# Altium PCB 89C51.PcbDoc
Units mil, origin at the board's own origin, x right, y up, seen from the top; angles counter-clockwise.
Board outline 2952.76 x 2952.76 mil, 2 copper layers (Top Layer, Bottom Layer); 22 components, 41 nets, 122 pads, 976 vias.
Unrouted connection lines stored in the file: 16.
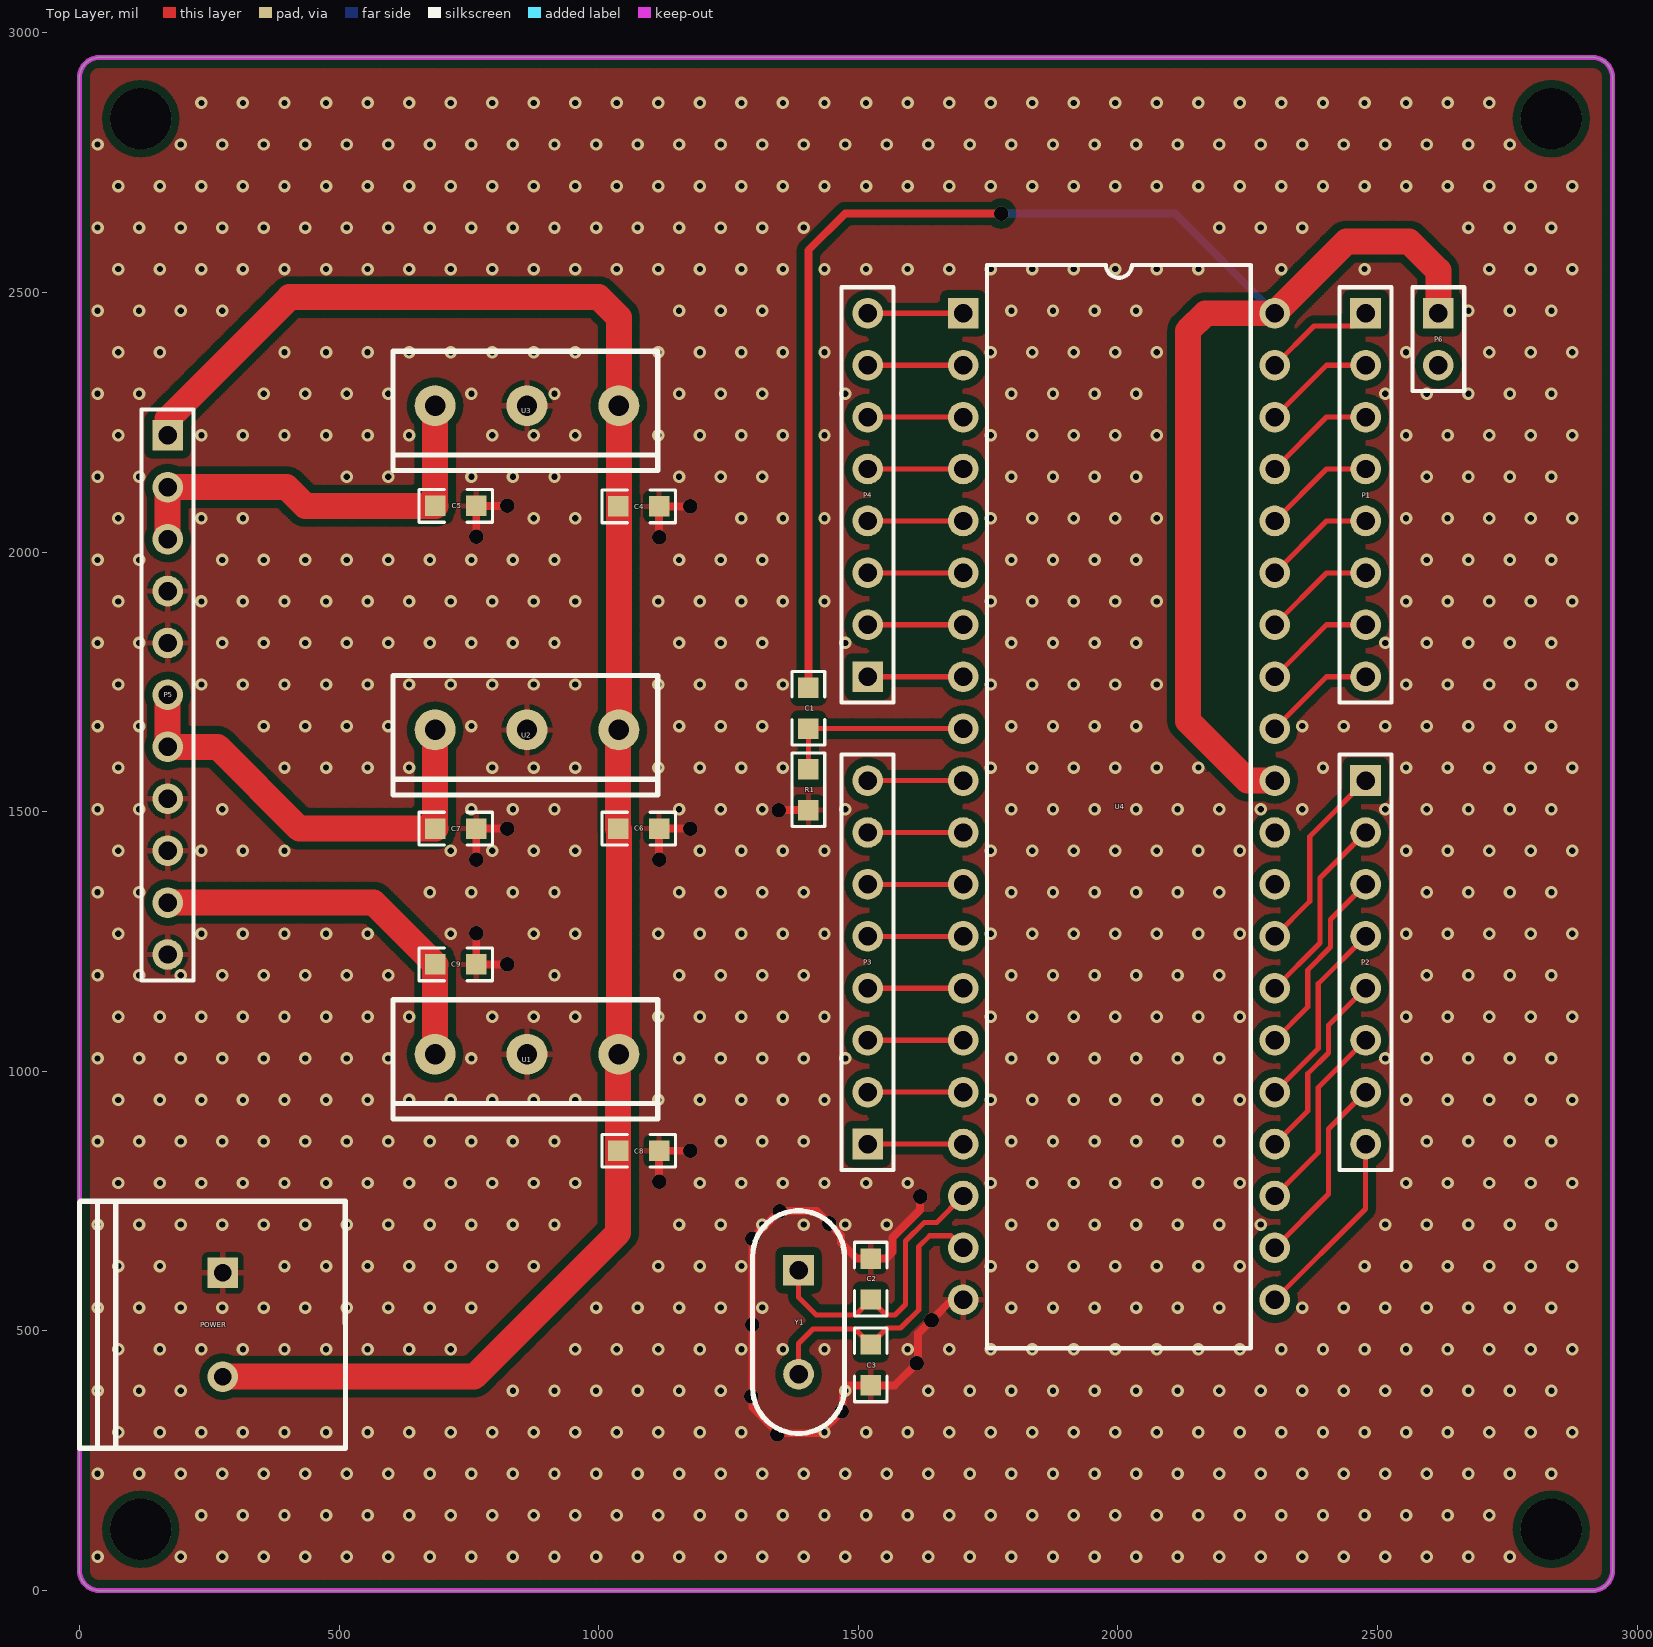
[diagram p0: Top Layer view]
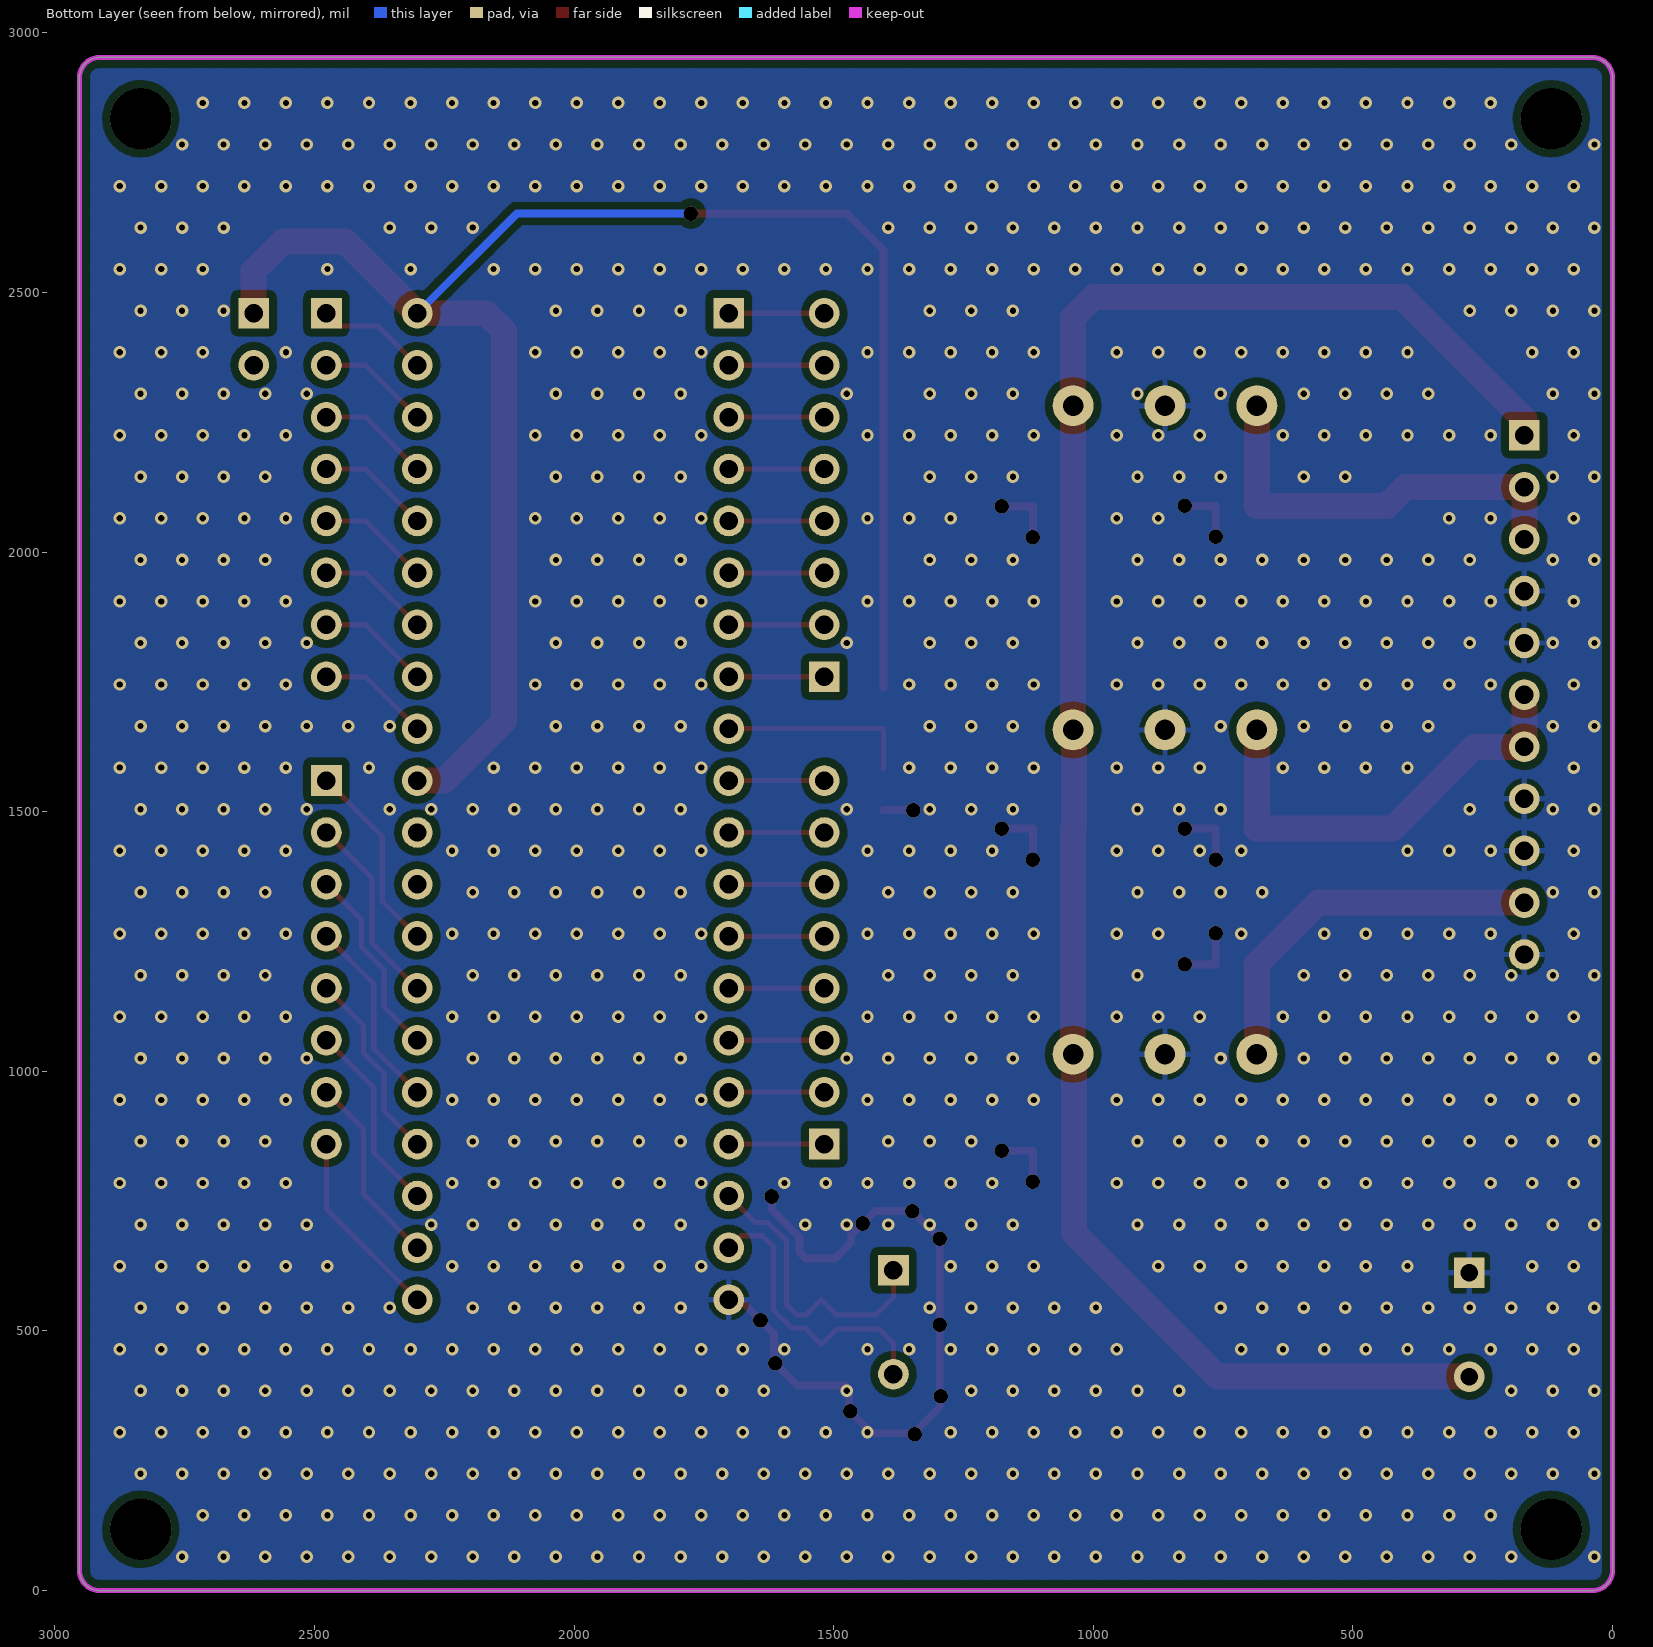
[diagram p1: Bottom Layer view, seen from below]
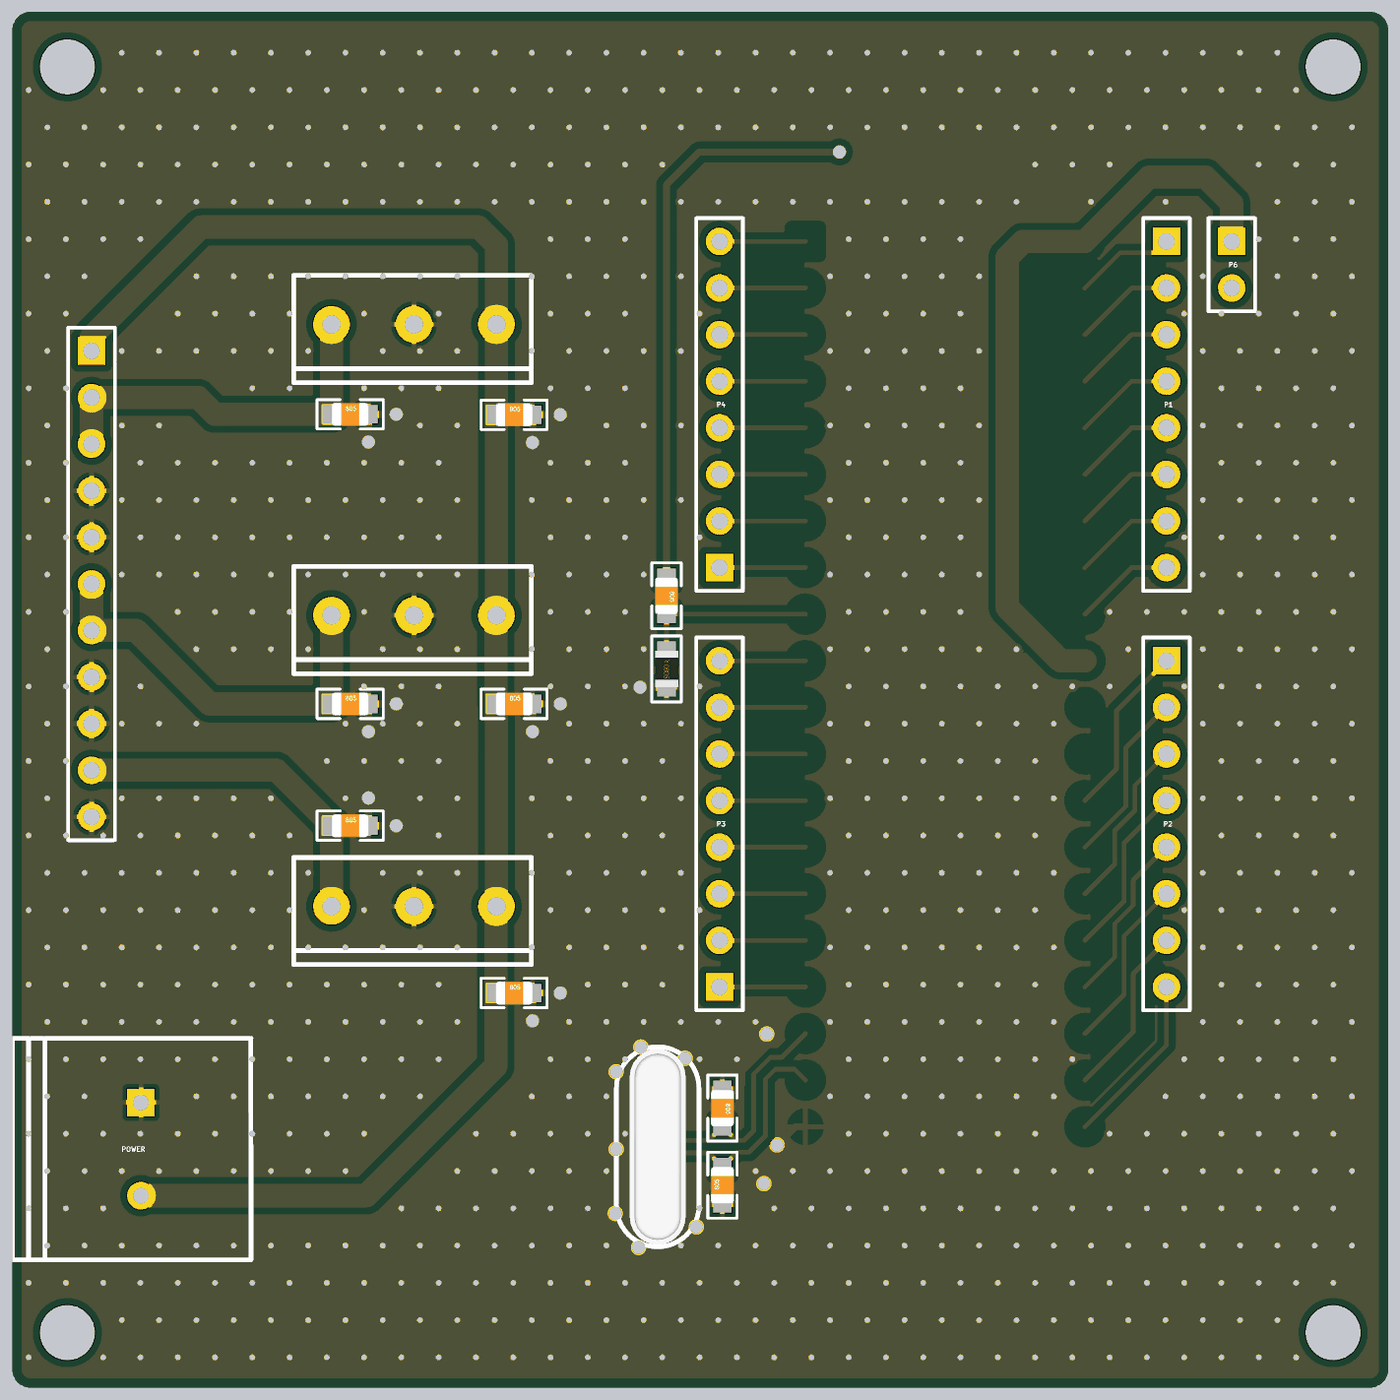
[diagram p2: 3D render of the assembled board from above, using the file's embedded part models]

## Layer stack, top to bottom
Top Solder: solder mask 0.4, Solder Resist, Dk 3.5
Top Layer: signal copper 1.4
Dielectric 1: dielectric 12.6, FR-4, Dk 4.8
Bottom Layer: signal copper 1.4
Bottom Solder: solder mask 0.4, Solder Resist, Dk 3.5

## Board outline
0,39.37 ccw(c39.37,39.37) 39.37,0 2913.39,0 ccw(c2913.39,39.37) 2952.76,39.37 2952.76,2913.39 ccw(c2913.39,2913.39) 2913.39,2952.76 39.37,2952.76 ccw(c39.37,2913.39) 0,2913.39

## Design rules (kind name [scope] priority, off if disabled: settings)
Clearance poly [inPolygon] p1: gap=15 ignorepadtopadclearanceinfootprint=FALSE
Clearance [All] p2: gap=10 ignorepadtopadclearanceinfootprint=FALSE
PolygonConnect PolygonConnect_1 [IsVia] p1: connectstyle=Direct reliefconductorwidth=10 reliefentries=4 polygonreliefangle="90 Angle" airgapwidth=10
PolygonConnect [All] p2: connectstyle=Relief reliefconductorwidth=10 reliefentries=4 polygonreliefangle="90 Angle" airgapwidth=10
RoomDefinition 89c51 [InComponentClass('89c51')] p1: confinementstyle=ConfineIn formatcopy=TRUE lockcomponents=FALSE outline -5165,-975 -3395,-975 -3395,-228 -5165,-228
RoutingVias [All] p1: holewidth=28 width=50 viastyle="Through Hole" minholewidth=28 minwidth=50 maxholewidth=28 maxwidth=50
SolderMaskExpansion [All] p1: expansion=2.5
Width PWR [InNetClass('PWR')] p1: maxlimit=60 minlimit=15 preferedwidth=15
Width [InNetClass('PWR')] p2: maxlimit=10 minlimit=10 preferedwidth=10
30 further rules are at their usual default settings.

## Classes and differential pairs
net class PWR: 5V1 5V2 6V GND NetC4_1 VCC

## Components (designator, comment, footprint, x,y, rotation, side; value= is the part's Value field where it differs from the comment)
C1 "CAP" Cap0805 1404,1699.37 r270 top
C2 "CAP" Cap0805 1524,600 r270 top
C3 "CAP" Cap0805 1524,434.63 r90 top
C4 "CAP" Cap0805 1077,2088 r0 top
C5 "CAP" Cap0805 725,2089 r0 top
C6 "CAP" Cap0805 1077,1467.5 r0 top
C7 "CAP" Cap0805 725,1467.5 r0 top
C8 "CAP" Cap0805 1077,847 r0 top
C9 "CAP" Cap0805 725,1206 r0 top
P1 "CON8" HDR1X8 2477,2460 r270 top
P2 "CON8" HDR1X8 2477,1560 r270 top
P3 "CON8" HDR1X8 1518,860 r90 top
P4 "CON8" HDR1X8 1518,1760 r90 top
P5 "CON11" HDR1X11 170,2225 r270 top
P6 "CON2_1" HDR1X2 2617,2460 r270 top
POWER "power" 电源端子 276,612 r270 top
R1 "RES" 0805R 1404,1542.63 r270 top
U1 "7805" 3P_7805 862,1033 r180 top
U2 "7805" 3P_7805 862,1657.5 r180 top
U3 "7805" 3P_7805 862,2282 r180 top
U4 "89C51" 89c51 -1118,1649 r0 top
Y1 "CRY" XTAL 1385,517 r270 top

## Footprints (in the part's own frame and the unit in brackets; to place one, negate y for a bottom-side part, rotate by r counter-clockwise, add the part's x,y. Pads: shape width x height; smd on the part's side, far side on the other; paste and mask are expansions set on the pad)
3P_7805 [mm]
  round 2 hole 1: 1(-4.496,0) 2(0,0) 3(4.496,0)
  silkscreen extent -6.4,-2.67 6.55,3.18
89c51 [mm]
  rect 1.5x1.5 hole 0.9: 1(71.628,20.599)
  round 1.5 hole 0.9: 2(71.628,18.059) 3(71.628,15.519) 4(71.628,12.979) 5(71.628,10.439) 6(71.628,7.899) 7(71.628,5.359) 8(71.628,2.819) 9(71.628,0.279) 10(71.628,-2.261) 11(71.628,-4.801) 12(71.628,-7.341) 13(71.628,-9.881) 14(71.628,-12.421) 15(71.628,-14.961) 16(71.628,-17.501) 17(71.628,-20.041) 18(71.628,-22.581) 19(71.628,-25.121) 20(71.628,-27.661) 21(86.868,-27.661) 22(86.868,-25.121) 23(86.868,-22.581) 24(86.868,-20.041) 25(86.868,-17.501) 26(86.868,-14.961) 27(86.868,-12.421) 28(86.868,-9.881) 29(86.868,-7.341) 30(86.868,-4.801) 31(86.868,-2.261) 32(86.868,0.279) 33(86.868,2.819) 34(86.868,5.359) 35(86.868,7.899) 36(86.868,10.439) 37(86.868,12.979) 38(86.868,15.519) 39(86.868,18.059) 40(86.868,20.599)
  silkscreen extent 72.8,-30.03 85.7,22.97, body extent 71.62,-29.86 87.12,22.74, height 5.49
0805R [mm]
  rect 1x1 smd: 1(-1,0) 2(1,0)
  silkscreen extent -1.8,-0.8 1.8,0.8, body extent -1,-0.61 1,0.64, height 0.4
Cap0805 [mm] "Chip Capacitor, Body 2.0x1.3mm, IPC High Density"
  rect 1x1 smd: 1(-1,0) 2(1,0)
  silkscreen extent -1.8,-0.8 1.8,0.8, body extent -1,-0.62 1,0.63, height 0.78
HDR1X2 [mm] "Connector; Header; 2 Position"
  rect 1.5x1.5 hole 0.9: 1(0,0)
  round 1.5 hole 0.9: 2(2.54,0)
  silkscreen extent -1.27,-1.27 3.81,1.27
HDR1X8 [mm] "Connector; Header; 8 Position"
  rect 1.5x1.5 hole 0.9: 1(0,0)
  round 1.5 hole 0.9: 2(2.54,0) 3(5.08,0) 4(7.62,0) 5(10.16,0) 6(12.7,0) 7(15.24,0) 8(17.78,0)
  silkscreen extent -1.27,-1.27 19.05,1.27
HDR1X11 [mm] "Connector; Header; 11 Position"
  rect 1.5x1.5 hole 0.9: 1(0,0)
  round 1.5 hole 0.9: 2(2.54,0) 3(5.08,0) 4(7.62,0) 5(10.16,0) 6(12.7,0) 7(15.24,0) 8(17.78,0) 9(20.32,0) 10(22.86,0) 11(25.4,0)
  silkscreen extent -1.27,-1.27 26.67,1.27
XTAL [mm]
  rect 1.5x1.5 hole 0.9: 1(-2.54,0)
  round 1.5 hole 0.9: 2(2.54,0)
  silkscreen extent -5.45,-2.25 5.45,2.25, body extent -5.33,-1.52 5.33,1.52, height 11.96
电源端子 [mm] "双脚"
  rect 1.5x1.5 hole 0.855: 1(0,0)
  round 1.5 hole 0.855: 2(5.08,0)
  silkscreen extent -3.5,-7 8.58,6

## Part data
P5: library part COM11
P6: library part COM2_1
POWER: library part CON2

## Free pads (board coordinates)
  round 118.11 hole 118.11 unplated: 1(118.11,118.11) 1(118.11,2834.65) 1(2834.65,118.11) 1(2834.65,2834.65)

## Via types
v1: diameter 24, hole 12, Top Layer to Bottom Layer, tented both sides, 952 vias
v2: diameter 28, hole 28, Top Layer to Bottom Layer, tented both sides, 14 vias
v3: diameter 28, hole 28, Top Layer to Bottom Layer, 10 vias

## Nets (pads, with @x,y where several pads share a name; then routed paths per layer and width w, separated by ;. In a path a pad name is that pad's centre, name@x,y a point inside that pad or via, vN(x,y) a via of type N, cw(c..) or ccw(c..) an arc to the next point about the centre after c; other vN are vias at no path point)
5V1: C5.1 P5.2 P5.3 U3.3 | length 823.8
  Top Layer w50: P5.3 P5.2 399,2125 435,2089 C5.1 685,2089.63 U3.3
5V2: C7.1 P5.6 P5.7 U2.3 | length 871.1
  Top Layer w50: P5.6 P5.7 266,1625 423.5,1467.5 C7.1 685,1468.13 U2.3
6V: C9.1 P5.10 U1.3 | length 738.2
  Top Layer w50: P5.10 566.63,1325 C9.1 685,1205.37 U1.3
GND: C2.1 C3.1 C4.2 C5.2 C6.2 C7.2 C8.2 C9.2 P5.4 P5.5 P5.8 P5.9 P5.11 POWER.1 R1.2 U1.2 U2.2 U3.2 U4.20 | length 2158.4
  Top Layer w15: v2(764.37,1265.63) C9.2 v2(824,1206) ; v2(764.37,1407.87) C7.2 v2(824,1467.5) ; v2(764.37,2029.37) C5.2 v2(824,2089) ; v2(1116.37,787.37) C8.2 v2(1176,847) ; v2(1116.37,1407.87) C6.2 v2(1176,1467.5) ; v2(1116.37,2028.37) C4.2 v2(1176,2088) ; v2(1347.26,1503.26) R1.2 ; v3(1619,759) 1619,733 1566,680 1566,652 1553.37,639.37 C2.1 1497.63,639.37 1467,670 1467,684 v3(1444,707) 1420,731 v3(1349,731) v3(1296,678) v3(1296,512) 1296,353 1346,303 1426,303 v3(1468,345) 1470,347 1470,387 1478.26,395.26 C3.1 1570.26,395.26 v3(1613,438) 1615,440 1615,495 v3(1641,521) 1680,560 U4.20
  other v1: 35,65 195,65 275,65 355,65 435,65 515,65 595,65 675,65 755,65 835,65 915,65 995,65 1075,65 1155,65 1235,65 1315,65 1395,65 1475,65 1555,65 1635,65 1715,65 1795,65 1875,65 1955,65 2035,65 2115,65 2195,65 2275,65 2355,65 2435,65 2515,65 2595,65 2675,65 2755,65 235,145 315,145 395,145 475,145 555,145 635,145 715,145 795,145 875,145 955,145 1035,145 1115,145 1195,145 1275,145 1355,145 1435,145 1515,145 1595,145 1675,145 1755,145 1835,145 1915,145 1995,145 2075,145 2155,145 2235,145 2315,145 2395,145 2475,145 2555,145 2635,145 2715,145 35,225 115,225 195,225 275,225 355,225 435,225 515,225 595,225 675,225 755,225 835,225 915,225 995,225 1075,225 1155,225 1235,225 1315,225 1395,225 1475,225 1555,225 1635,225 1715,225 1795,225 1875,225 1955,225 2035,225 2115,225 2195,225 2275,225 2355,225 2435,225 2515,225 2595,225 2675,225 2755,225 2835,225 75,305 155,305 235,305 315,305 395,305 475,305 555,305 635,305 715,305 795,305 875,305 955,305 1035,305 1115,305 1195,305 1275,305 1435,305 1515,305 1595,305 1675,305 1755,305 1835,305 1915,305 1995,305 2075,305 2155,305 2235,305 2315,305 2395,305 2475,305 2555,305 2635,305 2715,305 2795,305 2875,305 35,385 115,385 195,385 835,385 915,385 995,385 1075,385 1155,385 1235,385 1475,385 1635,385 1715,385 1795,385 1875,385 1955,385 2035,385 2115,385 2195,385 2275,385 2355,385 2435,385 2515,385 2595,385 2675,385 2755,385 2835,385 75,465 155,465 235,465 315,465 395,465 475,465 555,465 635,465 715,465 955,465 1035,465 1115,465 1195,465 1275,465 1355,465 1435,465 1595,465 1675,465 1755,465 1835,465 1915,465 1995,465 2075,465 2155,465 2235,465 2315,465 2395,465 2475,465 2555,465 2635,465 2715,465 2795,465 2875,465 35,545 115,545 195,545 275,545 355,545 435,545 515,545 595,545 675,545 755,545 995,545 1075,545 1155,545 1235,545 1315,545 1795,545 1875,545 1955,545 2035,545 2115,545 2195,545 2355,545 2435,545 2515,545 2595,545 2675,545 2755,545 2835,545 75,625 155,625 395,625 475,625 555,625 635,625 715,625 795,625 875,625 1115,625 1195,625 1275,625 1755,625 1835,625 1915,625 1995,625 2075,625 2155,625 2235,625 2475,625 2555,625 2635,625 2715,625 2795,625 2875,625 35,705 115,705 195,705 275,705 355,705 435,705 515,705 595,705 675,705 755,705 835,705 915,705 1155,705 1235,705 1315,705 1395,705 1475,705 1555,705 1795,705 1875,705 1955,705 2035,705 2115,705 2195,705 2275,705 2515,705 2595,705 2675,705 2755,705 2835,705 75,785 155,785 235,785 315,785 395,785 475,785 555,785 635,785 715,785 795,785 875,785 955,785 1195,785 1275,785 1355,785 1435,785 1515,785 1595,785 1755,785 1835,785 1915,785 1995,785 2075,785 2155,785 2235,785 2555,785 2635,785 2715,785 2795,785 2875,785 35,865 115,865 195,865 275,865 355,865 435,865 515,865 595,865 675,865 755,865 835,865 915,865 1235,865 1315,865 1395,865 1795,865 1875,865 1955,865 2035,865 2115,865 2195,865 2595,865 2675,865 2755,865 2835,865 75,945 155,945 235,945 315,945 395,945 475,945 555,945 635,945 715,945 795,945 875,945 955,945 1115,945 1195,945 1275,945 1355,945 1435,945 1755,945 1835,945 1915,945 1995,945 2075,945 2155,945 2235,945 2555,945 2635,945 2715,945 2795,945 2875,945 35,1025 115,1025 195,1025 275,1025 355,1025 435,1025 515,1025 595,1025 755,1025 1155,1025 1235,1025 1315,1025 1395,1025 1475,1025 1795,1025 1875,1025 1955,1025 2035,1025 2115,1025 2195,1025 2515,1025 2595,1025 2675,1025 2755,1025 2835,1025 75,1105 155,1105 235,1105 315,1105 395,1105 475,1105 555,1105 635,1105 795,1105 875,1105 955,1105 1115,1105 1195,1105 1275,1105 1355,1105 1435,1105 1755,1105 1835,1105 1915,1105 1995,1105 2075,1105 2155,1105 2235,1105 2555,1105 2635,1105 2715,1105 2795,1105 2875,1105 35,1185 115,1185 195,1185 275,1185 355,1185 435,1185 515,1185 595,1185 915,1185 1155,1185 1235,1185 1315,1185 1395,1185 1795,1185 1875,1185 1955,1185 2035,1185 2115,1185 2195,1185 2595,1185 2675,1185 2755,1185 2835,1185 75,1265 235,1265 315,1265 395,1265 475,1265 555,1265 715,1265 875,1265 955,1265 1115,1265 1195,1265 1275,1265 1355,1265 1435,1265 1755,1265 1835,1265 1915,1265 1995,1265 2075,1265 2155,1265 2235,1265 2555,1265 2635,1265 2715,1265 2795,1265 2875,1265 35,1345 115,1345 675,1345 755,1345 835,1345 915,1345 1155,1345 1235,1345 1315,1345 1395,1345 1795,1345 1875,1345 1955,1345 2035,1345 2115,1345 2195,1345 2595,1345 2675,1345 2755,1345 2835,1345 75,1425 235,1425 315,1425 395,1425 715,1425 795,1425 875,1425 955,1425 1195,1425 1275,1425 1355,1425 1435,1425 1755,1425 1835,1425 1915,1425 1995,1425 2075,1425 2155,1425 2235,1425 2555,1425 2635,1425 2715,1425 2795,1425 2875,1425 35,1505 115,1505 275,1505 755,1505 835,1505 915,1505 1155,1505 1235,1505 1315,1505 1475,1505 1795,1505 1875,1505 1955,1505 2035,1505 2115,1505 2195,1505 2275,1505 2355,1505 2515,1505 2595,1505 2675,1505 2755,1505 2835,1505 75,1585 395,1585 475,1585 555,1585 635,1585 795,1585 875,1585 955,1585 1115,1585 1195,1585 1275,1585 1355,1585 1755,1585 1835,1585 1915,1585 1995,1585 2075,1585 2155,1585 2395,1585 2555,1585 2635,1585 2715,1585 2795,1585 2875,1585 35,1665 115,1665 355,1665 435,1665 515,1665 595,1665 755,1665 1155,1665 1235,1665 1315,1665 1795,1665 1875,1665 1955,1665 2035,1665 2355,1665 2435,1665 2515,1665 2595,1665 2675,1665 2755,1665 2835,1665 75,1745 235,1745 315,1745 395,1745 475,1745 555,1745 635,1745 715,1745 795,1745 875,1745 955,1745 1115,1745 1195,1745 1275,1745 1355,1745 1755,1745 1835,1745 1915,1745 1995,1745 2075,1745 2555,1745 2635,1745 2715,1745 2795,1745 2875,1745 35,1825 115,1825 275,1825 355,1825 435,1825 515,1825 595,1825 675,1825 755,1825 835,1825 915,1825 1155,1825 1235,1825 1315,1825 1475,1825 1795,1825 1875,1825 1955,1825 2035,1825 2515,1825 2595,1825 2675,1825 2755,1825 2835,1825 75,1905 235,1905 315,1905 395,1905 475,1905 555,1905 635,1905 715,1905 795,1905 875,1905 955,1905 1115,1905 1195,1905 1275,1905 1355,1905 1435,1905 1755,1905 1835,1905 1915,1905 1995,1905 2075,1905 2555,1905 2635,1905 2715,1905 2795,1905 2875,1905 35,1985 115,1985 275,1985 355,1985 435,1985 515,1985 595,1985 675,1985 755,1985 835,1985 915,1985 1155,1985 1235,1985 1315,1985 1795,1985 1875,1985 1955,1985 2035,1985 2595,1985 2675,1985 2755,1985 2835,1985 75,2065 235,2065 315,2065 875,2065 955,2065 1275,2065 1355,2065 1435,2065 1755,2065 1835,2065 1915,2065 1995,2065 2075,2065 2555,2065 2635,2065 2715,2065 2795,2065 2875,2065 35,2145 115,2145 515,2145 595,2145 755,2145 835,2145 915,2145 1155,2145 1235,2145 1315,2145 1795,2145 1875,2145 1955,2145 2035,2145 2595,2145 2675,2145 2755,2145 2835,2145 75,2225 235,2225 315,2225 395,2225 475,2225 555,2225 635,2225 795,2225 875,2225 955,2225 1115,2225 1195,2225 1275,2225 1355,2225 1435,2225 1755,2225 1835,2225 1915,2225 1995,2225 2075,2225 2555,2225 2635,2225 2715,2225 2795,2225 2875,2225 35,2305 115,2305 355,2305 435,2305 515,2305 595,2305 755,2305 915,2305 1155,2305 1235,2305 1315,2305 1475,2305 1795,2305 1875,2305 1955,2305 2035,2305 2515,2305 2595,2305 2675,2305 2755,2305 2835,2305 75,2385 155,2385 395,2385 475,2385 555,2385 635,2385 715,2385 795,2385 875,2385 955,2385 1115,2385 1195,2385 1275,2385 1355,2385 1435,2385 1755,2385 1835,2385 1915,2385 1995,2385 2075,2385 2555,2385 2715,2385 2795,2385 2875,2385 35,2465 115,2465 195,2465 275,2465 1155,2465 1235,2465 1315,2465 1795,2465 1875,2465 1955,2465 2035,2465 2675,2465 2755,2465 2835,2465 75,2545 155,2545 235,2545 315,2545 395,2545 475,2545 555,2545 635,2545 715,2545 795,2545 875,2545 955,2545 1035,2545 1115,2545 1195,2545 1275,2545 1355,2545 1435,2545 1515,2545 1595,2545 1675,2545 1755,2545 1835,2545 1915,2545 1995,2545 2075,2545 2155,2545 2315,2545 2475,2545 2715,2545 2795,2545 2875,2545 35,2625 115,2625 195,2625 275,2625 355,2625 435,2625 515,2625 595,2625 675,2625 755,2625 835,2625 915,2625 995,2625 1075,2625 1155,2625 1235,2625 1315,2625 1395,2625 2195,2625 2275,2625 2355,2625 2675,2625 2755,2625 2835,2625 75,2705 155,2705 235,2705 315,2705 395,2705 475,2705 555,2705 635,2705 715,2705 795,2705 875,2705 955,2705 1035,2705 1115,2705 1195,2705 1275,2705 1355,2705 1435,2705 1515,2705 1595,2705 1675,2705 1755,2705 1835,2705 1915,2705 1995,2705 2075,2705 2155,2705 2235,2705 2315,2705 2395,2705 2475,2705 2555,2705 2635,2705 2715,2705 2795,2705 2875,2705 35,2785 195,2785 275,2785 355,2785 435,2785 515,2785 595,2785 675,2785 755,2785 835,2785 915,2785 995,2785 1075,2785 1155,2785 1235,2785 1315,2785 1395,2785 1475,2785 1555,2785 1635,2785 1715,2785 1795,2785 1875,2785 1955,2785 2035,2785 2115,2785 2195,2785 2275,2785 2355,2785 2435,2785 2515,2785 2595,2785 2675,2785 2755,2785 235,2865 315,2865 395,2865 475,2865 555,2865 635,2865 715,2865 795,2865 875,2865 955,2865 1035,2865 1115,2865 1195,2865 1275,2865 1355,2865 1435,2865 1515,2865 1595,2865 1675,2865 1755,2865 1835,2865 1915,2865 1995,2865 2075,2865 2155,2865 2235,2865 2315,2865 2395,2865 2475,2865 2555,2865 2635,2865 2715,2865
  other v3: 1344,301 1294,374
NetC1_2: C1.2 R1.1 U4.9 | length 376
  Top Layer w10: R1.1 C1.2 U4.9
NetC2_2: C2.2 U4.18 Y1.1 | length 574
  Top Layer w10: Y1.1 1385,565 1419,531 1494.37,531 C2.2 1553.63,531 1571,531 1591,551 1591,673 1627,709 1651,709 U4.18
NetC3_2: C3.2 U4.19 Y1.2 | length 568
  Top Layer w10: Y1.2 1385,476 1413,504 1494,504 C3.2 1555.5,505.5 1581.56,505.5 1616.5,540.44 1616.5,662.44 1637.56,683.5 1678.5,683.5 U4.19
NetC4_1: C4.1 C6.1 C8.1 P5.1 POWER.2 U1.1 U2.1 U3.1 | length 3654.2
  Top Layer w50: P5.1 170,2256 405,2491 1000,2491 1039,2452 U3.1 U2.1 1037.63,1656.13 C6.1 1039,1466.13 U1.1 1037.63,1031.63 C8.1 1037.63,689.63 760,412 POWER.2
NetP1_1: P1.1 U4.39 | length 216.4
  Top Layer w10: U4.39 2377.47,2435.47 2452.47,2435.47 P1.1
NetP1_2: P1.2 U4.38 | length 216.4
  Top Layer w10: U4.38 2402,2360 P1.2
NetP1_3: P1.3 U4.37 | length 216.4
  Top Layer w10: U4.37 2402,2260 P1.3
NetP1_4: P1.4 U4.36 | length 216.4
  Top Layer w10: U4.36 2402,2160 P1.4
NetP1_5: P1.5 U4.35 | length 216.4
  Top Layer w10: U4.35 2402,2060 P1.5
NetP1_6: P1.6 U4.34 | length 216.4
  Top Layer w10: U4.34 2402,1960 P1.6
NetP1_7: P1.7 U4.33 | length 216.4
  Top Layer w10: U4.33 2402,1860 P1.7
NetP1_8: P1.8 U4.32 | length 216.4
  Top Layer w10: U4.32 2402,1760 P1.8
NetP2_1: P2.1 U4.28 | length 372.5
  Top Layer w10: U4.28 2369.5,1327.5 2369.5,1452.5 P2.1
NetP2_2: P2.2 U4.27 | length 372.5
  Top Layer w10: U4.27 2389.5,1247.5 2389.5,1372.5 P2.2
NetP2_3: P2.3 U4.26 | length 372.5
  Top Layer w10: U4.26 2365.75,1123.75 2365.75,1195.47 2409.5,1239.22 2409.5,1292.5 P2.3
NetP2_4: P2.4 U4.25 | length 372.5
  Top Layer w10: U4.25 2385.75,1043.75 2385.75,1168.75 P2.4
NetP2_5: P2.5 U4.24 | length 372.5
  Top Layer w10: U4.24 2365.75,923.75 2365.75,995.47 2405.75,1035.47 2405.75,1088.75 P2.5
NetP2_6: P2.6 U4.23 | length 372.5
  Top Layer w10: U4.23 2385.75,843.75 2385.75,968.75 P2.6
NetP2_7: P2.7 U4.22 | length 372.5
  Top Layer w10: U4.22 2405.75,763.75 2405.75,888.75 P2.7
NetP2_8: P2.8 U4.21 | length 372.5
  Top Layer w10: U4.21 2477,735 P2.8
NetP3_1: P3.1 U4.17 | length 184
  Top Layer w10: P3.1 U4.17
NetP3_2: P3.2 U4.16 | length 184
  Top Layer w10: P3.2 U4.16
NetP3_3: P3.3 U4.15 | length 184
  Top Layer w10: P3.3 U4.15
NetP3_4: P3.4 U4.14 | length 184
  Top Layer w10: P3.4 U4.14
NetP3_5: P3.5 U4.13 | length 184
  Top Layer w10: P3.5 U4.13
NetP3_6: P3.6 U4.12 | length 184
  Top Layer w10: P3.6 U4.12
NetP3_7: P3.7 U4.11 | length 184
  Top Layer w10: P3.7 U4.11
NetP3_8: P3.8 U4.10 | length 184
  Top Layer w10: P3.8 U4.10
NetP4_1: P4.1 U4.8 | length 184
  Top Layer w10: P4.1 U4.8
NetP4_2: P4.2 U4.7 | length 184
  Top Layer w10: P4.2 U4.7
NetP4_3: P4.3 U4.6 | length 184
  Top Layer w10: P4.3 U4.6
NetP4_4: P4.4 U4.5 | length 184
  Top Layer w10: P4.4 U4.5
NetP4_5: P4.5 U4.4 | length 184
  Top Layer w10: P4.5 U4.4
NetP4_6: P4.6 U4.3 | length 184
  Top Layer w10: P4.6 U4.3
NetP4_7: P4.7 U4.2 | length 184
  Top Layer w10: P4.7 U4.2
NetP4_8: P4.8 U4.1 | length 184
  Top Layer w10: P4.8 U4.1
VCC: C1.1 P6.1 U4.31 U4.40 | length 3473.3
  Top Layer w15: C1.1 1404,2581 1475,2652 v2(1775,2652)
  Top Layer w50: U4.31 2250,1560 2135,1675 2135,2426 2169,2460 U4.40 2440,2598 2561,2598 2617,2542 P6.1
  Bottom Layer w15: v2(1775,2652) 2110,2652 U4.40
pads on no net: P6.2 U4.29 U4.30

## Polygon pours and split planes (outlines as drawn)
GND on Top Layer "Top Layer-No Net" (hatched 90Degree grid 4 track 5, remove dead copper, pour order 20): 2941,2953 2960,2934 2960,-6 6,-6 -12,12 -12,2953
GND on Bottom Layer "Top Layer-No Net" (hatched 90Degree grid 4 track 5, remove dead copper, pour order 24): 63,2952 69,2958 2955,2958 2955,30 2920,-5 2912,3 -5,3 -5,2959 -1,2955 112,2955

## Keep-outs
Keep-Out Layer:
  the board outline again, w10

## Other copper
Top Layer:
  pour cut-out: 1518,960 1518,860 1702,860 1702,960
  pour cut-out: 1518,1560 1518,1507.26 1702.9,1507.26 1702,1508.16 1702,1560
  pour cut-out: 1518,1760 1702,1760 1702,1812.74 1519.1,1812.74 1519,1812.84
  pour cut-out: 1518,2460 1518,2408.16 1519,2407.16 1519.1,2407.26 1702,2407.26 1702,2460
  pour cut-out: 1515,1513.04 1519,1509.04 1519,907.18 1701.92,907.18 1703,908.26 1703,1512.84
  pour cut-out: 1519,2412.84 1519,1807.18 1519.08,1807.26 1702,1807.26 1702,2411.82 1703,2412.82
  pour cut-out: 2311,1427.4 2311,609.2 2315,605.2 2454.5,744.7 2454.5,884.76 2477,907.26 2471,913.26 2471,1526.59
  pour cut-out: 2310,2423 2310,1707.37 2315,1702.37 2315,1648 2474.06,1807.06 2479,1807.06 2479,2412.82 2468.82,2423
  pour cut-out: 2167,2423 2310,2423 2306,2419 2306,1575 2162,1575 2169,1582 2169,2428

## Dimensions
39.37,0 to 2913.39,0 on Keep-Out Layer
39.37,0 to 39.37,2952.76 on Keep-Out Layer